# EAGLE board Amazing Gogo (EAGLE 9.7.0)

Size 496.32 x 635.85 mm. Coordinates in mm from the lower left corner, seen from the top.
Outline: 0,0 496.32,0 496.32,635.85 0,635.85 0,0
Copper layers (1*16): Top 0.035mm / dielectric 1.5mm / Bottom 0.035mm
Design rules "default": minimum track width 6mil, minimum drill 0.35mm, track to track 6mil, track to pad 6mil, pad to pad 6mil, via to via 6mil, smd to smd 6mil, copper to edge 40mil, drill to drill 6mil, minimum pad ring 10mil, minimum via ring 8mil, stop-mask expansion 4mil, vias tented up to drill 0mil, thermal gap 10mil

## Footprints (pad centres in the part's own frame; a part is rotated, then mirrored left to right if it is on the bottom)
LED-RGB-5MM = drill 0.9: B 0.635,0.635; C -0.635,-0.635; G 1.905,-0.635; R -1.905,0.635
LEDRD254W60D565H860B = drill 0.981 pad 1.581: 1 -1.27,0; 2 1.27,0
RESAD1016W63L850D250B = drill 0.83 pad 1.43: 1 -5.08,0; 2 5.08,0
HA-06-SM065 = drill 1 pad 1.676: 1 -2.54,-2.54; 2 0,2.54; 3 2.54,-2.54
SWITCH-MOMENTARY-PTH-6.5MM = drill 1.016 pad 1.88: 1 -3.251,2.261; 2 3.251,2.261; 3 -3.251,-2.261; 4 3.251,-2.261
ARDUINO-UNO-R3-SHIELD = drill 1.016 pad 1.88: 3.3V 24.13,-2.54; 5V 24.13,0; A0 24.13,12.7; A1 24.13,15.24; A2 24.13,17.78; A3 24.13,20.32; A4 24.13,22.86; A5 24.13,25.4; AREF -24.13,-13.97; D2 -24.13,20.32; D3 -24.13,17.78; D4 -24.13,15.24; D5 -24.13,12.7; D6 -24.13,10.16; D7 -24.13,7.62; D8 -24.13,3.81; D9 -24.13,1.27; D10 -24.13,-1.27; D11 -24.13,-3.81; D12 -24.13,-6.35; D13 -24.13,-8.89; GND@0 24.13,2.54; GND@1 24.13,5.08; GND@2 -24.13,-11.43; IOREF 24.13,-7.62; NC 24.13,-10.16; RES 24.13,-5.08; RX -24.13,25.4; SCL -24.13,-19.05; SDA -24.13,-16.51; TX -24.13,22.86; VIN 24.13,7.62

## Placement (x,y rotation side)
D1  LED-RGBRCBG-PTH  [LED-RGB-5MM]  118.86,377.14 0 top
D2  LED-RGBRCBG-PTH  [LED-RGB-5MM]  439.74,382.56 0 top
D3  LED-RGBRCBG-PTH  [LED-RGB-5MM]  121.07,610.42 0 top
D4  RED  [LEDRD254W60D565H860B]  82.8,86.45 180 top
D5  RED  [LEDRD254W60D565H860B]  279.13,215.93 90 top
D6  RED  [LEDRD254W60D565H860B]  274.05,215.93 90 top
D7  RED  [LEDRD254W60D565H860B]  268.97,215.93 90 top
D8  RED  [LEDRD254W60D565H860B]  263.89,215.93 90 top
D9  RED  [LEDRD254W60D565H860B]  258.81,215.93 90 top
D10  RED  [LEDRD254W60D565H860B]  253.73,215.93 90 top
D11  RED  [LEDRD254W60D565H860B]  248.65,215.93 90 top
D12  RED  [LEDRD254W60D565H860B]  243.57,215.93 90 top
D13  RED  [LEDRD254W60D565H860B]  238.49,215.93 90 top
D14  RED  [LEDRD254W60D565H860B]  233.41,215.93 90 top
D15  RED  [LEDRD254W60D565H860B]  90.42,86.45 180 top
D16  RED  [LEDRD254W60D565H860B]  98.04,86.45 180 top
D17  RED  [LEDRD254W60D565H860B]  105.42,86.45 180 top
D18  RED  [LEDRD254W60D565H860B]  112.55,86.7 180 top
D19  RED  [LEDRD254W60D565H860B]  82.8,78.32 180 top
D20  RED  [LEDRD254W60D565H860B]  90.42,78.32 180 top
D21  RED  [LEDRD254W60D565H860B]  98.04,78.32 180 top
D22  RED  [LEDRD254W60D565H860B]  105.66,78.32 180 top
D23  RED  [LEDRD254W60D565H860B]  113.28,78.32 180 top
D24  RED  [LEDRD254W60D565H860B]  82.8,70.19 180 top
D25  RED  [LEDRD254W60D565H860B]  90.42,70.19 180 top
D26  RED  [LEDRD254W60D565H860B]  98.04,70.19 180 top
D27  RED  [LEDRD254W60D565H860B]  105.66,70.19 180 top
D28  RED  [LEDRD254W60D565H860B]  113.28,70.19 180 top
D29  RED  [LEDRD254W60D565H860B]  82.8,62.07 180 top
D30  RED  [LEDRD254W60D565H860B]  90.42,62.07 180 top
D31  RED  [LEDRD254W60D565H860B]  98.04,62.07 180 top
D32  RED  [LEDRD254W60D565H860B]  105.66,62.07 180 top
D33  RED  [LEDRD254W60D565H860B]  113.28,62.07 180 top
D34  RED  [LEDRD254W60D565H860B]  82.8,53.94 180 top
D35  RED  [LEDRD254W60D565H860B]  90.42,53.94 180 top
D36  RED  [LEDRD254W60D565H860B]  98.04,53.94 180 top
D37  RED  [LEDRD254W60D565H860B]  105.66,53.94 180 top
D38  RED  [LEDRD254W60D565H860B]  113.28,53.94 180 top
D39  LED-RGBRCBG-PTH  [LED-RGB-5MM]  431.25,608.36 0 top
R1  220  [RESAD1016W63L850D250B]  115.05,366.98 90 top
R2  220  [RESAD1016W63L850D250B]  435.93,372.4 90 top
R3  220  [RESAD1016W63L850D250B]  441.01,372.4 90 top
R4  220  [RESAD1016W63L850D250B]  120.13,366.98 90 top
R5  220  [RESAD1016W63L850D250B]  122.67,366.98 90 top
R6  220  [RESAD1016W63L850D250B]  443.55,372.4 90 top
R7  220  [RESAD1016W63L850D250B]  117.26,600.26 90 top
R8  220  [RESAD1016W63L850D250B]  122.34,600.26 90 top
R9  220  [RESAD1016W63L850D250B]  124.88,600.26 90 top
R10  220  [RESAD1016W63L850D250B]  84.15,45.01 90 top
R11  220  [RESAD1016W63L850D250B]  91.66,45.06 90 top
R12  220  [RESAD1016W63L850D250B]  99.29,44.96 90 top
R13  220  [RESAD1016W63L850D250B]  274.05,232.44 90 top
R14  220  [RESAD1016W63L850D250B]  279.13,232.44 90 top
R15  220  [RESAD1016W63L850D250B]  268.97,232.44 90 top
R16  220  [RESAD1016W63L850D250B]  263.89,232.44 90 top
R17  220  [RESAD1016W63L850D250B]  258.81,232.44 90 top
R18  220  [RESAD1016W63L850D250B]  253.73,232.44 90 top
R19  220  [RESAD1016W63L850D250B]  248.65,232.44 90 top
R20  220  [RESAD1016W63L850D250B]  243.57,232.44 90 top
R21  220  [RESAD1016W63L850D250B]  238.49,232.44 90 top
R22  220  [RESAD1016W63L850D250B]  233.41,232.44 90 top
R23  220  [RESAD1016W63L850D250B]  106.99,44.91 90 top
R24  220  [RESAD1016W63L850D250B]  114.65,45.34 90 top
R25  220  [RESAD1016W63L850D250B]  68.46,53.98 0 top
R26  220  [RESAD1016W63L850D250B]  68.17,61.9 0 top
R27  220  [RESAD1016W63L850D250B]  68.17,70.05 0 top
R28  220  [RESAD1016W63L850D250B]  68,78.46 0 top
R29  220  [RESAD1016W63L850D250B]  67.83,86.13 0 top
R30  220  [RESAD1016W63L850D250B]  427.44,598.2 90 top
R31  220  [RESAD1016W63L850D250B]  432.52,598.2 90 top
R32  220  [RESAD1016W63L850D250B]  435.06,598.2 90 top
RPOT1  250k  [HA-06-SM065]  489.27,367.32 0 top
S2  SWITCH_MOMENTARY  [SWITCH-MOMENTARY-PTH-6.5MM]  168.39,365.71 90 top
S4  SWITCH_MOMENTARY  [SWITCH-MOMENTARY-PTH-6.5MM]  480.78,596.93 90 top
S5  SWITCH_MOMENTARY  [SWITCH-MOMENTARY-PTH-6.5MM]  160.77,365.71 90 top
U1  ARDUINO-UNO-R3-SHIELD  [ARDUINO-UNO-R3-SHIELD]  51.27,372.72 270 top
U2  ARDUINO-UNO-R3-SHIELD  [ARDUINO-UNO-R3-SHIELD]  372.15,377.42 270 top
U3  ARDUINO-UNO-R3-SHIELD  [ARDUINO-UNO-R3-SHIELD]  53.48,606.01 270 top
U4  ARDUINO-UNO-R3-SHIELD  [ARDUINO-UNO-R3-SHIELD]  47.88,29.84 270 top
U5  ARDUINO-UNO-R3-SHIELD  [ARDUINO-UNO-R3-SHIELD]  237.18,150.71 270 top
U6  ARDUINO-UNO-R3-SHIELD  [ARDUINO-UNO-R3-SHIELD]  363.66,603.94 270 top

## Library data of the parts
D1-D3 D39 R1-R32 RPOT1 S2 S4 S5 U1-U6 = Tinkercad
D4-D38 = Tinkercad; CATEGORY: Opto-Electronic; SUB-CATEGORY: LED; VALUE: LED_RED

## Nets
D1_B: D1.B R4.2
D1_G: D1.G R5.2
D1_R: D1.R R1.2
D2_B: D2.B R3.2
D2_G: D2.G R6.2
D2_R: D2.R R2.2
D3_B: D3.B R8.2
D3_G: D3.G R9.2
D3_R: D3.R R7.2
D5_C: D5.2 R14.1
D6_C: D6.2 R13.1
D7_C: D7.2 R15.1
D8_C: D8.2 R16.1
D9_C: D9.2 R17.1
D10_C: D10.2 R18.1
D11_C: D11.2 R19.1
D12_C: D12.2 R20.1
D13_C: D13.2 R21.1
D14_C: D14.2 R22.1
D15_A: D15.1 D20.1 D25.1 D30.1 D35.1 R11.2
D15_C: D4.2 D15.2 D16.2 D17.2 D18.2 R29.2
D18_A: D18.1 D23.1 D28.1 D33.1 D38.1 R24.2
D20_C: D19.2 D20.2 D21.2 D22.2 D23.2 R28.2
D25_C: D24.2 D25.2 D26.2 D27.2 D28.2 R27.2
D30_C: D29.2 D30.2 D31.2 D32.2 D33.2 R26.2
D34_A: D4.1 D19.1 D24.1 D29.1 D34.1 R10.2
D36_A: D16.1 D21.1 D26.1 D31.1 D36.1 R12.2
D37_A: D17.1 D22.1 D27.1 D32.1 D37.1 R23.2
D39_B: D39.B R31.2
D39_G: D39.G R32.2
D39_R: D39.R R30.2
U1_D2: S5.3 S5.4 U1.D2
U1_D3: S2.3 S2.4 U1.D3
U1_D9: R1.1 U1.D9
U1_D10: R4.1 U1.D10
U1_D11: R5.1 U1.D11
U1_GND: D1.C S2.1 S2.2 S5.1 S5.2 U1.GND@0 U1.GND@1 U1.GND@2
U2_5V: RPOT1.3 U2.5V
U2_A0: RPOT1.2 U2.A0
U2_D9: R2.1 U2.D9
U2_D10: R3.1 U2.D10
U2_D11: R6.1 U2.D11
U2_GND: D2.C RPOT1.1 U2.GND@0 U2.GND@1 U2.GND@2
U3_D9: R7.1 U3.D9
U3_D10: R8.1 U3.D10
U3_D11: R9.1 U3.D11
U3_GND: D3.C U3.GND@0 U3.GND@1 U3.GND@2
U4_A1: R24.1 U4.A1
U4_A2: R23.1 U4.A2
U4_A3: R12.1 U4.A3
U4_A4: R11.1 U4.A4
U4_D2: R10.1 U4.D2
U4_D9: R25.1 U4.D4 U4.D9
U4_D10: R26.1 U4.D10
U4_D11: R27.1 U4.D11
U4_D12: R28.1 U4.D12
U4_D13: R29.1 U4.D13
U4_RX: D34.2 D35.2 D36.2 D37.2 D38.2 R25.2 U4.RX
U5_D2: D5.1 U5.D2
U5_D3: D6.1 U5.D3
U5_D4: D7.1 U5.D4
U5_D5: D8.1 U5.D5
U5_D6: D9.1 U5.D6
U5_D7: D10.1 U5.D7
U5_D8: D11.1 U5.D8
U5_D9: D12.1 U5.D9
U5_D10: D13.1 U5.D10
U5_D11: D14.1 U5.D11
U5_GND: R13.2 R14.2 R15.2 R16.2 R17.2 R18.2 R19.2 R20.2 R21.2 R22.2 U5.GND@0 U5.GND@1 U5.GND@2
U6_D2: S4.3 S4.4 U6.D2
U6_D9: R30.1 U6.D9
U6_D10: R31.1 U6.D10
U6_D11: R32.1 U6.D11
U6_GND: D39.C S4.1 S4.2 U6.GND@0 U6.GND@1 U6.GND@2

## Tracks (layer width: path | path; a pad name or v marks a point on that pad's centre or on a via)
D1_B  (1 unrouted)
D1_G  (1 unrouted)
D1_R  (1 unrouted)
D2_B  (1 unrouted)
D2_G  (1 unrouted)
D2_R  (1 unrouted)
D3_B  (1 unrouted)
D3_G  (1 unrouted)
D3_R  (1 unrouted)
D5_C  (1 unrouted)
D6_C  (1 unrouted)
D7_C  (1 unrouted)
D8_C  (1 unrouted)
D9_C  (1 unrouted)
D10_C  (1 unrouted)
D11_C  (1 unrouted)
D12_C  (1 unrouted)
D13_C  (1 unrouted)
D14_C  (1 unrouted)
D15_A  (5 unrouted)
D15_C  (5 unrouted)
D18_A  (5 unrouted)
D20_C  (5 unrouted)
D25_C  (5 unrouted)
D30_C  (5 unrouted)
D34_A  (5 unrouted)
D36_A  (5 unrouted)
D37_A  (5 unrouted)
D39_B  (1 unrouted)
D39_G  (1 unrouted)
D39_R  (1 unrouted)
U1_D2  (2 unrouted)
U1_D3  (2 unrouted)
U1_D9  (1 unrouted)
U1_D10  (1 unrouted)
U1_D11  (1 unrouted)
U1_GND  (7 unrouted)
U2_5V  (1 unrouted)
U2_A0  (1 unrouted)
U2_D9  (1 unrouted)
U2_D10  (1 unrouted)
U2_D11  (1 unrouted)
U2_GND  (4 unrouted)
U3_D9  (1 unrouted)
U3_D10  (1 unrouted)
U3_D11  (1 unrouted)
U3_GND  (3 unrouted)
U4_A1  (1 unrouted)
U4_A2  (1 unrouted)
U4_A3  (1 unrouted)
U4_A4  (1 unrouted)
U4_D2  (1 unrouted)
U4_D9  (2 unrouted)
U4_D10  (1 unrouted)
U4_D11  (1 unrouted)
U4_D12  (1 unrouted)
U4_D13  (1 unrouted)
U4_RX  (6 unrouted)
U5_D2  (1 unrouted)
U5_D3  (1 unrouted)
U5_D4  (1 unrouted)
U5_D5  (1 unrouted)
U5_D6  (1 unrouted)
U5_D7  (1 unrouted)
U5_D8  (1 unrouted)
U5_D9  (1 unrouted)
U5_D10  (1 unrouted)
U5_D11  (1 unrouted)
U5_GND  (12 unrouted)
U6_D2  (2 unrouted)
U6_D9  (1 unrouted)
U6_D10  (1 unrouted)
U6_D11  (1 unrouted)
U6_GND  (5 unrouted)